# EAGLE board camera trigger control v1.0 (EAGLE 6.5.0)
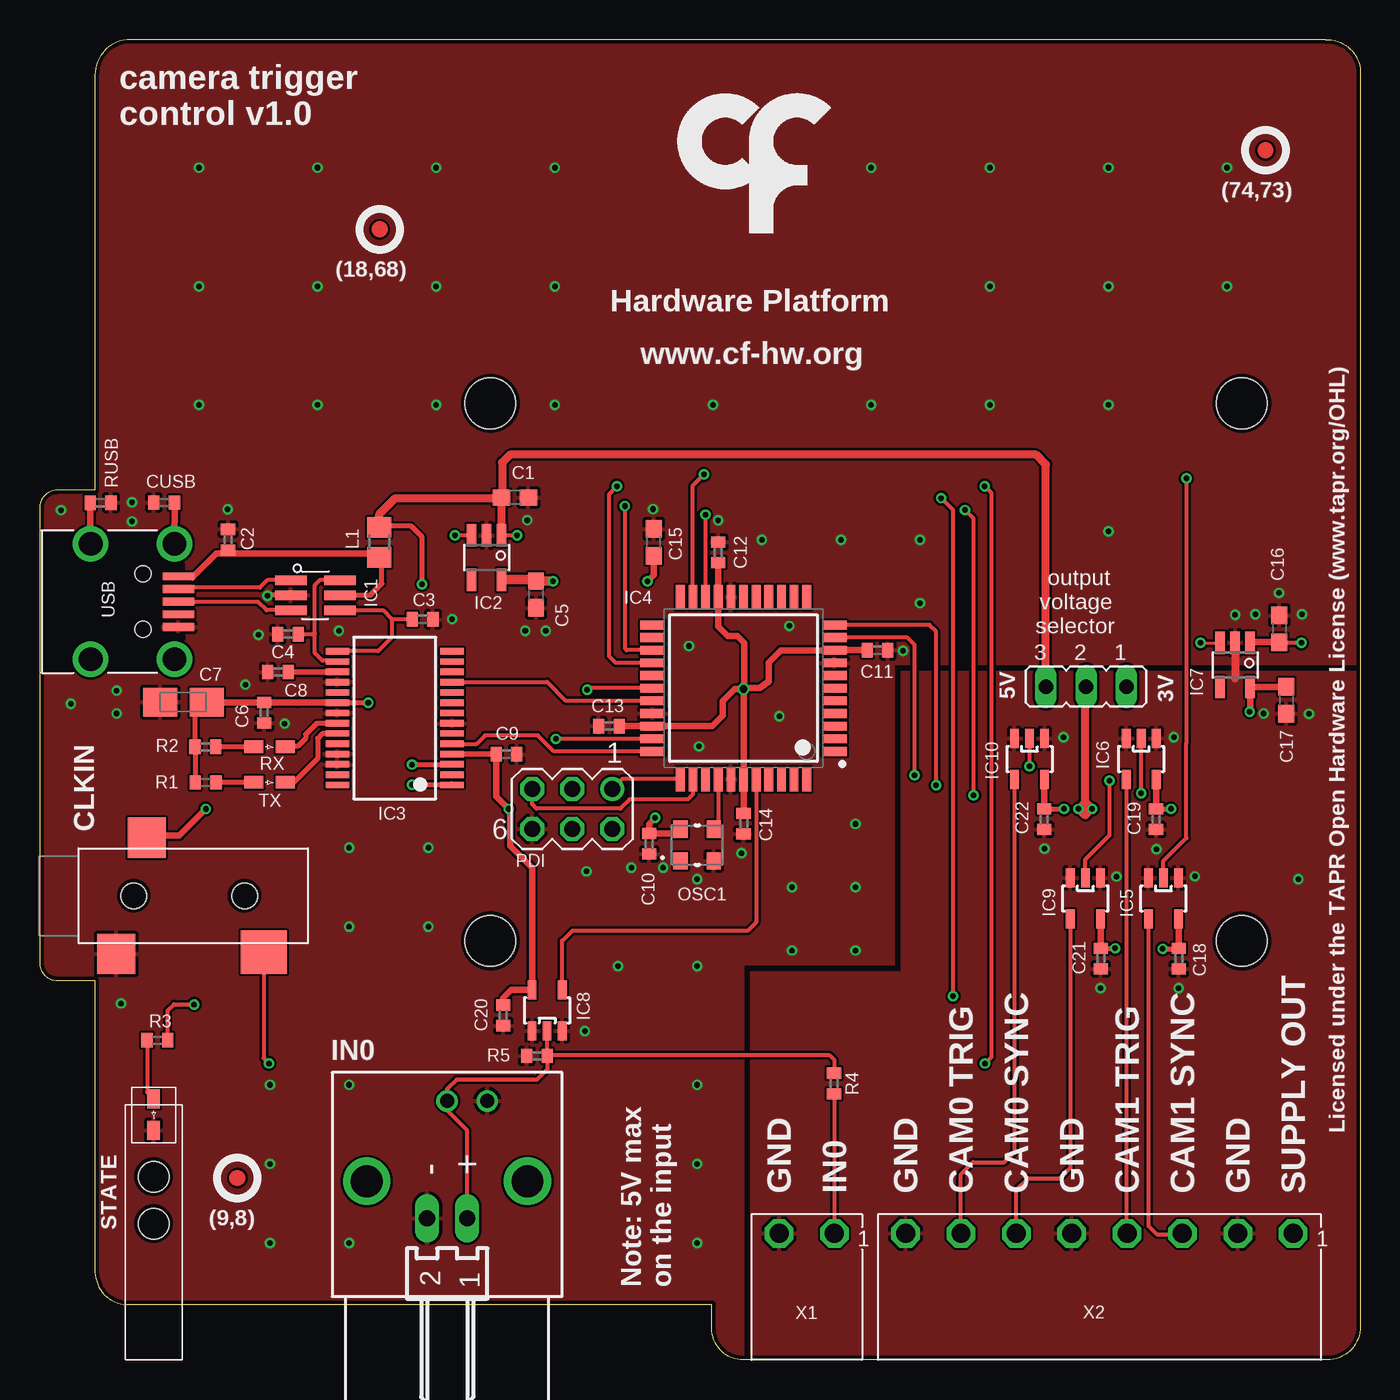
[diagram p0: board, top side]
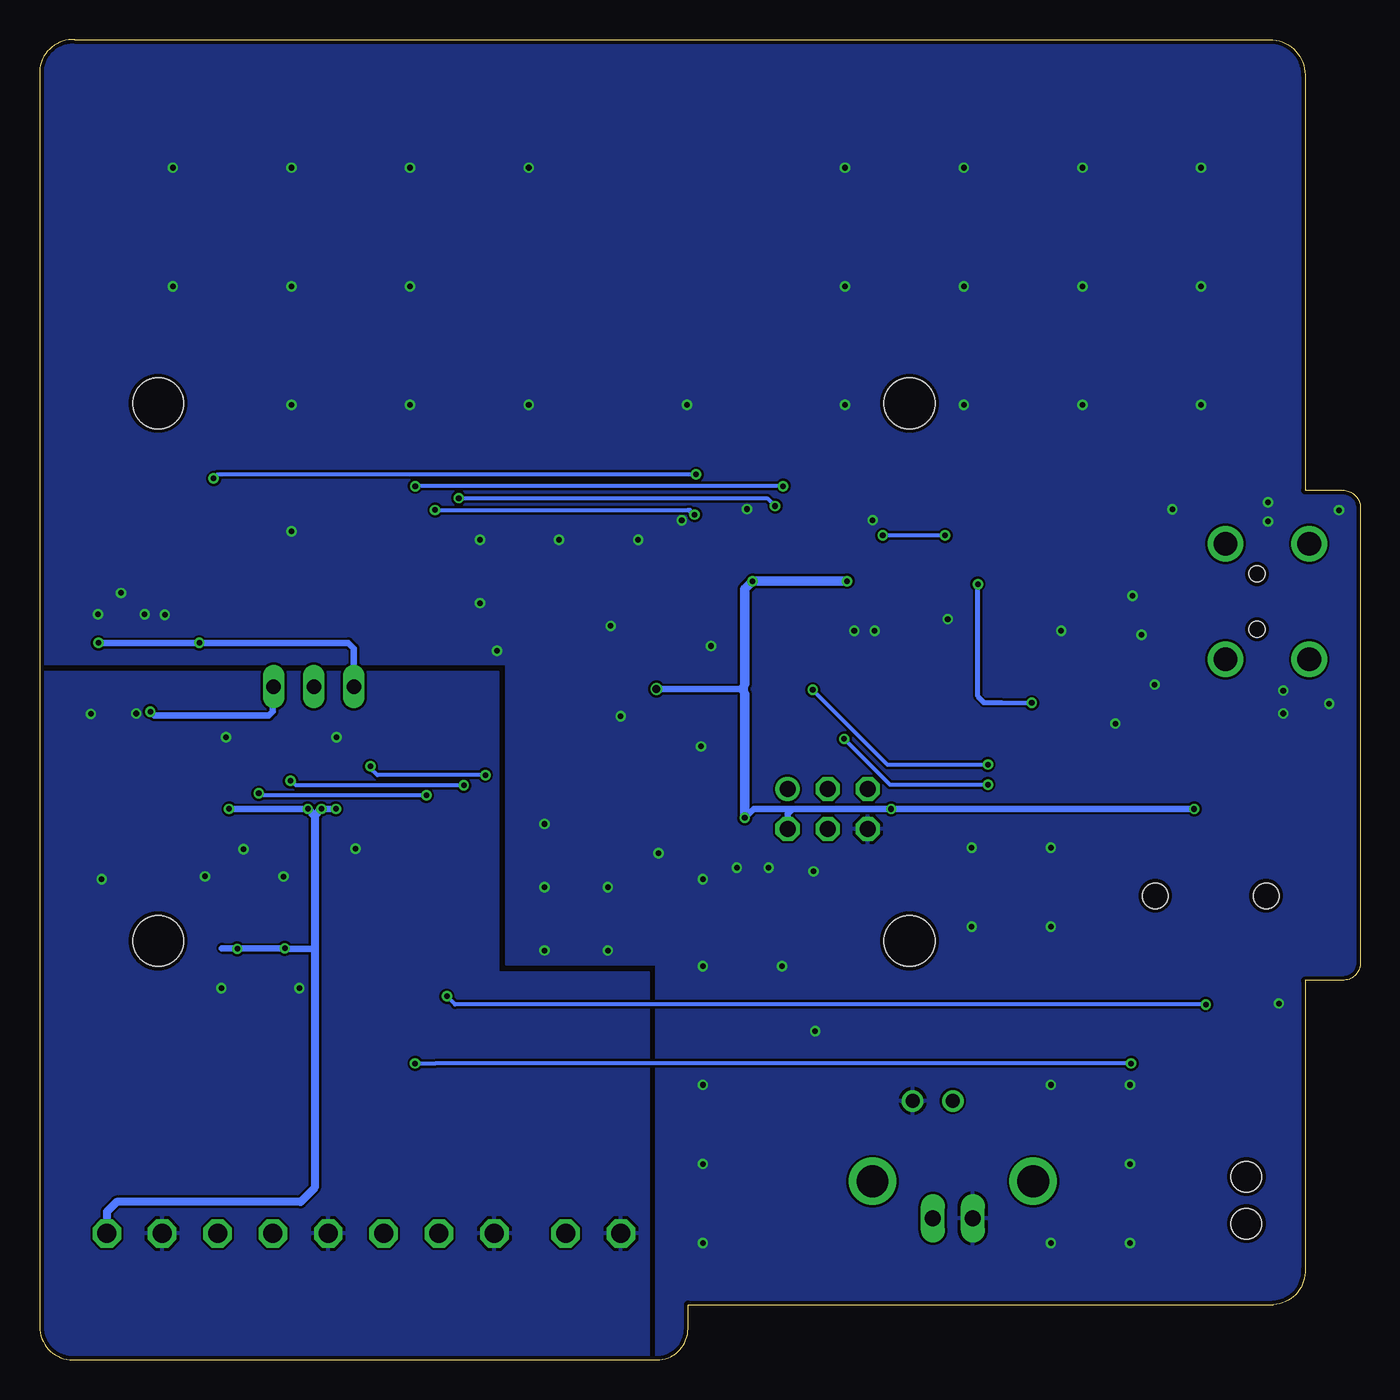
[diagram p1: board, bottom side, seen from below]

Size 83.5 x 83.5 mm. Coordinates in mm from the lower left corner, seen from the top.
Outline: 3.5,81.26 3.5,55 1.12,55 arc90 0,53.88 0,25.12 arc90 1.12,24 3.5,24 3.5,5.74 arc90 5.5,3.5 42.5,3.5 42.5,1.99 arc90 44.49,0 81.39,0 arc90 83.5,2.11 83.5,81.5 arc90 81.26,83.5 5.74,83.5 arc90 3.5,81.26
Copper layers (1*16): Top 0.018mm / dielectric 1.55mm / Bottom 0.018mm
Design rules "eC_2Layer_PClass6_BaseCopperO18_eCDefault *": minimum track width 0.15mm, minimum drill 0.35mm, track to track 0.15mm, track to pad 0.15mm, pad to pad 0.15mm, via to via 0.15mm, smd to smd 0mil, copper to edge 0.25mm, drill to drill 0.35mm, minimum pad ring 0.175mm, minimum via ring 0.125mm, stop-mask expansion 0mil, vias tented up to drill 0.45mm, thermal gap 0.2mm
Holes 3.2 mm at 28.5,60.5 28.5,26.5 76,60.5 76,26.5

## Footprints (pad centres in the part's own frame; a part is rotated, then mirrored left to right if it is on the bottom)
C0603 = smd 1.1 x 1: 1 -0.85,0; 2 0.85,0
C0402 = smd 0.7 x 0.9: 1 -0.65,0; 2 0.65,0
A/3216-18W = smd 2.15 x 1.8: + 1.475,0; - -1.475,0
35RASMT2BHNTRX = smd 2.4 x 2.55: 1 0.8,3.675; 5 -1.1,-3.675 | smd 2.9 x 2.75: 4 8.2,-3.575 | hole 1.6: 0,0; 7,0
SOT23-6L = smd 0.6 x 2: P$1 -0.95,-1.55; P$2 0,-1.55; P$3 0.95,-1.55; P$4 0.95,1.55; P$5 0,1.55; P$6 -0.95,1.55
TSOT23-5 = smd 0.6 x 1.408: 1 -0.95,-1.404; 2 0,-1.404; 3 0.95,-1.404; 4 0.95,1.404; 5 -0.95,1.404
SSOP28 = smd 0.4 x 1.5: 1 -4.225,-3.625; 2 -3.575,-3.625; 3 -2.925,-3.625; 4 -2.275,-3.625; 5 -1.625,-3.625; 6 -0.975,-3.625; 7 -0.325,-3.625; 8 0.325,-3.625; 9 0.975,-3.625; 10 1.625,-3.625; 11 2.275,-3.625; 12 2.925,-3.625; 13 3.575,-3.625; 14 4.225,-3.625; 15 4.225,3.625; 16 3.575,3.625; 17 2.925,3.625; 18 2.275,3.625; 19 1.625,3.625; 20 0.975,3.625; 21 0.325,3.625; 22 -0.325,3.625; 23 -0.975,3.625; 24 -1.625,3.625; 25 -2.275,3.625; 26 -2.925,3.625; 27 -3.575,3.625; 28 -4.225,3.625
QFP80P1200X1200X120-44N = smd 1.55 x 0.55: 1 -5.75,4; 2 -5.75,3.2; 3 -5.75,2.4; 4 -5.75,1.6; 5 -5.75,0.8; 6 -5.75,0; 7 -5.75,-0.8; 8 -5.75,-1.6; 9 -5.75,-2.4; 10 -5.75,-3.2; 11 -5.75,-4; 23 5.75,-4; 24 5.75,-3.2; 25 5.75,-2.4; 26 5.75,-1.6; 27 5.75,-0.8; 28 5.75,0; 29 5.75,0.8; 30 5.75,1.6; 31 5.75,2.4; 32 5.75,3.2; 33 5.75,4 | smd 0.55 x 1.55: 12 -4,-5.75; 13 -3.2,-5.75; 14 -2.4,-5.75; 15 -1.6,-5.75; 16 -0.8,-5.75; 17 0,-5.75; 18 0.8,-5.75; 19 1.6,-5.75; 20 2.4,-5.75; 21 3.2,-5.75; 22 4,-5.75; 34 4,5.75; 35 3.2,5.75; 36 2.4,5.75; 37 1.6,5.75; 38 0.8,5.75; 39 0,5.75; 40 -0.8,5.75; 41 -1.6,5.75; 42 -2.4,5.75; 43 -3.2,5.75; 44 -4,5.75
SOT23-5 = smd 0.55 x 1.2: 1 -0.95,-1.3; 2 0,-1.3; 3 0.95,-1.3; 4 0.95,1.3; 5 -0.95,1.3
BNC_RA = drill 0.9 pad 1.27: 1 0,-5.08; 2 -2.54,-5.08 | drill 2: P$1 -5.08,0; P$2 5.08,0
7395-02 = drill 1.016 long: 1 1.27,0; 2 -1.27,0
JP2 = drill 0.914 long: 1 -2.54,0; 2 0,0; 3 2.54,0
R0805 = smd 1.3 x 1.5: 1 -0.95,0; 2 0.95,0
OSCILLATOR_3.2X2.5 = smd 0.9 x 1.1: P$1 -1.05,-1; P$2 1.05,-1; P$3 1.05,1; P$4 -1.05,1
MA03-2 = drill 1.016: 1 -2.54,-1.27 | drill 1.016 octagon: 2 -2.54,1.27; 3 0,-1.27; 4 0,1.27; 5 2.54,-1.27; 6 2.54,1.27
R0402 = smd 0.7 x 0.9: 1 -0.65,0; 2 0.65,0
LED_HAND = smd 1.2 x 0.8: A -1,0; K 1,0
LED_PIPE_7513D2-L = hole 1.93: -1.486,0; 1.486,0
240-0002-1 = smd 0.5 x 2: P$1 -1.6,8.65; P$2 -0.8,8.65; P$3 0,8.65; P$4 0.8,8.65; P$5 1.6,8.65 | drill 1.5: SHIELD_1 -3.65,3.1; SHIELD_2 3.65,3.1; SHIELD_3 3.65,8.4; SHIELD_4 -3.65,8.4 | hole 1: -1.75,6.4; 1.75,6.4
CON_3.5MM_1X2 = drill 1.2 octagon: P1 -1.75,0; P2 1.75,0
CON_3.5MM_1X8 = drill 1.2 octagon: P1 -12.25,0; P2 -8.75,0; P3 -5.25,0; P4 -1.75,0; P5 1.75,0; P6 5.25,0; P7 8.75,0; P8 12.25,0

## Placement (x,y rotation side)
C1  10uF  [C0603]  30.05,54.54 0 top
C2  100nF  [C0402]  11.92,51.88 90 top
C3  47pF  [C0402]  24.22,46.84 0 top
C4  47pF  [C0402]  15.71,45.9 180 top
C5  10uF  [C0603]  31.39,48.41 270 top
C6  100nF  [C0402]  14.21,40.93 270 top
C7  4.7uF  [A/3216-18W]  9.09,41.61 0 top
C8  100nF  [C0402]  15.08,43.51 180 top
C9  100nF  [C0402]  29.53,38.3 0 top
C10  100nF  [C0402]  38.54,32.64 270 top
C11  100nF  [C0402]  52.97,44.88 0 top
C12  100nF  [C0402]  42.9,51.07 90 top
C13  100nF  [C0402]  36.01,40.08 180 top
C14  330nF  [C0402]  44.51,33.91 270 top
C15  10uF  [C0603]  38.82,51.7 90 top
C16  10uF  [C0603]  78.38,46.24 90 top
C17  10uF  [C0603]  78.81,41.72 270 top
C18  100nF  [C0402]  72.01,25.37 270 top
C19  100nF  [C0402]  70.58,34.19 270 top
C20  100nF  [C0402]  29.32,21.79 270 top
C21  100nF  [C0402]  67.08,25.37 270 top
C22  100nF  [C0402]  63.52,34.19 270 top
CLKIN  [35RASMT2BHNTRX]  5.96,29.36 0 top
CUSB  4.7nF  [C0402]  7.88,54.22 180 top
IC1  USBLC6-2SC6  [SOT23-6L]  17.44,48.36 270 top
IC2  LP5907MFX-3.3  [TSOT23-5]  28.27,50.74 180 top
IC3  FT232RL  [SSOP28]  22.45,40.59 90 top
IC4  ATXMEGA32A4U-AU  [QFP80P1200X1200X120-44N]  44.5,42.48 180 top
IC5  M74VHC1GT50DTT1G  [SOT23-5]  71.05,29.18 180 top
IC6  M74VHC1GT50DTT1G  [SOT23-5]  69.64,38 180 top
IC7  LP5907MFX-3.3  [TSOT23-5]  75.58,43.95 180 top
IC8  SN74LVC1G125  [SOT23-5]  32.09,22.11 0 top
IC9  M74VHC1GT50DTT1G  [SOT23-5]  66.11,29.18 180 top
IC10  M74VHC1GT50DTT1G  [SOT23-5]  62.58,38 180 top
IN  BNC  [BNC_RA]  25.77,11.3 180 top
IN1  [7395-02]  25.77,8.96 0 top
JP1  [JP2]  66.16,42.58 180 top
L1  ???  [R0805]  21.48,51.72 270 top
OSC1  [OSCILLATOR_3.2X2.5]  41.57,32.56 0 top
PDI  [MA03-2]  33.68,34.84 180 top
R1  2050 NA  [R0402]  10.5,36.53 180 top
R2  680 NA  [R0402]  10.48,38.77 180 top
R3  68  [R0402]  7.44,20.22 0 top
R4  330  [R0402]  50.22,17.49 90 top
R5  100k  [R0402]  31.45,19.23 180 top
RUSB  1M  [R0402]  3.87,54.2 0 top
RX  GREEN NA  [LED_HAND]  14.53,38.77 0 top
STATE  GREEN  [LED_HAND]  7.21,15.51 270 top
TX  RED NA  [LED_HAND]  14.53,36.53 0 top
U$1  [LED_PIPE_7513D2-L]  7.21,10.11 90 top
U$4  [FIDUCIAL]  12.5,11.5 0 top
U$5  [FIDUCIAL]  21.5,71.5 0 top
U$6  [FIDUCIAL]  77.5,76.5 0 top
U$9  [LOGO_6]  43.5,77 0 top
USB  [240-0002-1]  0.13,47.96 270 top
X1  CON_3.5MM_1X2  [CON_3.5MM_1X2]  48.5,8 180 top
X2  CON_3.5MM_1X8  [CON_3.5MM_1X8]  67,8 180 top

## Library data of the parts
C1-C22 CUSB L1 R1-R5 RUSB = rcl
CLKIN IN USB X1 X2 = CNP-connectors
IC1 = CNP 2
IC2 IC7 = CNP
IC3 = ftdichip; MPN: FT232RL; OC_FARNELL: 1146032; OC_NEWARK: 91K9918
IC4 = xmega-a4
IC5 IC6 IC8-IC10 = My_library 0v2
IN1 = con-molex; OC_FARNELL: 9731601; OC_NEWARK: unknown
JP1 = jumper
OSC1 RX STATE TX U$1 U$9 = CNP-miscellaneous
PDI = con-lstb; OC_FARNELL: unknown; OC_NEWARK: unknown
U$4-U$6 = fiducial

## Nets
+5V: C1.1 C6.1 C7.+ C16.1 IC2.1 IC2.3 IC3.20 IC7.1 IC7.3 JP1.3 L1.1 R1.2 R2.2
CAM0_S: IC4.11 IC9.2
CAM0_SYNC: IC9.4 X2.P6
CAM0_T: IC4.10 IC10.2
CAM0_TRIG: IC10.4 X2.P7
CAM1_S: IC4.21 IC5.2
CAM1_SYNC: IC5.4 X2.P3
CAM1_T: IC4.20 IC6.2
CAM1_TRIG: IC6.4 X2.P4
CLK_IN: CLKIN.4 IC4.26
FT_CTS: IC3.11 IC4.29
FT_RTS: IC3.3 IC4.28
FT_RXD: IC3.5 IC4.33
FT_TXD: IC3.1 IC4.32
GND: C1.2 C2.2 C3.2 C4.2 C5.2 C6.2 C7.- C8.2 C9.2 C10.2 C11.2 C12.2 C13.2 C14.2 C15.2 C16.2 C17.2 C18.2 C19.2 C20.2 C21.2 C22.2 CLKIN.5 CUSB.2 IC1.P$2 IC2.2 IC3.7 IC3.18 IC3.21 IC3.25 IC3.26 IC4.8 IC4.18 IC4.30 IC4.38 IC5.1 IC5.3 IC6.1 IC6.3 IC7.2 IC8.1 IC8.3 IC9.1 IC9.3 IC10.1 IC10.3 IN1.2 IN.2 OSC1.P$2 PDI.6 R5.2 RUSB.2 STATE.K USB.P$5 X1.P2 X2.P2 X2.P5 X2.P8
IN0: IC8.2 IN1.1 IN.1 R4.2 R5.1
IN0_CONNECTOR: R4.1 X1.P1
INPUT0: IC4.40 IC8.4
N$23: R3.1 STATE.A
N$38: C8.1 IC3.17
N$39: C2.1 IC1.P$5 L1.2 USB.P$1
N$40: IC1.P$1 USB.P$2
N$47: R2.1 RX.A
N$48: IC3.23 TX.K
N$49: IC3.22 RX.K
N$50: IC1.P$3 USB.P$3
N$59: CUSB.1 USB.SHIELD_4
N$61: RUSB.1 USB.SHIELD_1
N$62: R1.1 TX.A
OSC1: IC4.37 OSC1.P$3
PDI-CLK: IC4.35 PDI.5
PDI-DATA: IC4.34 PDI.1
STATE: IC4.25 R3.2
USBDM: C4.1 IC1.P$6 IC3.16
USBDP: C3.1 IC1.P$4 IC3.15
VCC: C18.1 C19.1 C21.1 C22.1 IC5.5 IC6.5 IC9.5 IC10.5 JP1.2 X2.P1
VCCIO: C5.1 C9.1 C10.1 C11.1 C12.1 C13.1 C14.1 C15.1 C20.1 CLKIN.1 IC2.5 IC3.4 IC4.9 IC4.19 IC4.31 IC4.39 IC8.5 OSC1.P$4 PDI.2
VDIG[3V]: C17.1 IC7.5 JP1.1

## Tracks (layer width: path | path; a pad name or v marks a point on that pad's centre or on a via)
+5V  (via drill 0.35 pad 0.65)
  Top 0.203: IC7.1 77.86,45.36 | v73.4,45.35 IC7.3
  Top 0.254: IC2.3 v26.27,52.15 v26.26,52.14 | v30.2,52.14 29.22,52.14 IC2.1 | v79.77,45.35 78.42,45.35 C16.1
  Top 0.305: IC2.1 | 16.31,41.56 C6.1 | v20.78,41.55 IC3.20 | R1.2 9.83,36.55 R2.2 9.84,38.79 9.84,41.45 9.7,41.59 10.56,41.59 C7.+ | v24.18,49.06 24.18,52.05 23.51,52.72 21.54,52.72 L1.1 | 76.56,45.39 IC7.1
  Top 0.406: IC3.20 16.31,41.56 10.61,41.56 C7.+ | C16.1 76.56,45.39
  Top 0.508: IC2.1 | IC2.1 29.22,54.52 C1.1 | L1.1 21.49,53.49 22.5,54.5 29.16,54.5 C1.1 | JP1.3 63.62,56.63 63,57.25 29.75,57.25 29.25,56.75 29.25,54.59 C1.1
  Bottom 0.254: v26.26,52.14 v30.2,52.14
  Bottom 0.305: v24.18,49.06 24.18,41.96 23.81,41.57 22.7,41.57 v20.78,41.55
  Bottom 0.406: v79.77,45.35 v73.4,45.35 63.97,45.35 63.62,45 JP1.3
CAM0_S  (via drill 0.35 pad 0.65)
  Top 0.254: v67.64,36.62 67.64,33.17 66.11,31.65 IC9.2 | v56.68,36.34 56.68,46.06 56.26,46.49 IC4.11
  Bottom 0.254: v56.68,36.34 67.28,36.34 v67.64,36.62
CAM0_SYNC
  Top 0.254: IC9.4 65.16,12.16 64.5,11.5 62.5,11.5 61.75,10.75 X2.P6
CAM0_T  (via drill 0.35 pad 0.65)
  Top 0.254: v62.58,37.54 IC10.2 | v55.31,36.98 55.31,45.22 54.86,45.68 IC4.10
  Bottom 0.254: v55.31,36.98 62.15,36.98 62.58,37.41 v62.58,37.54
CAM0_TRIG
  Top 0.254: IC10.4 61.63,13.13 61.25,12.75 61,12.5 59,12.5 58.25,11.75 X2.P7
CAM1_S  (via drill 0.35 pad 0.65)
  Top 0.254: IC4.21 41.3,55.3 v42,56 | v72.5,55.75 72.5,39.5 72.5,39 72.5,33 71.05,31.55 IC5.2
  Bottom 0.254: v42,56 72.25,56 v72.5,55.75
CAM1_SYNC
  Top 0.254: IC5.4 70.1,8.47 70.61,7.96 72.21,7.96 X2.P3
CAM1_T  (via drill 0.35 pad 0.65)
  Top 0.254: v69.64,35.84 IC6.2 | v59.05,35.71 59.05,53.2 v58.5,53.75 | IC4.20 42.1,53.45 v42.09,53.46
  Bottom 0.254: v59.05,35.71 69.52,35.71 v69.64,35.84 | v58.5,53.75 42.5,53.75 | 42.5,53.75 42.38,53.75 v42.09,53.46 42.21,53.46 42.5,53.75
CAM1_TRIG
  Top 0.254: IC6.4 68.69,8.06 X2.P4
CLK_IN  (via drill 0.35 pad 0.65)
  Top 0.254: IC4.26 36.42,44.08 36,44.5 36,54.75 v36.5,55.25 | CLKIN.4 14.16,19.09 v14.5,18.75 | v59.75,55.25 60.19,54.81 60.19,19.18 v59.76,18.75
  Bottom 0.254: v36.5,55.25 v59.75,55.25 | v14.5,18.75 58.5,18.75 v59.76,18.75
FT_CTS
  Top 0.254: 26.09,42.88 32.08,42.88 33.27,41.68 IC4.29
  Top 0.305: 26.09,42.88 IC3.11
FT_RTS  (via drill 0.35 pad 0.65)
  Top 0.254: IC4.28 34.72,42.48 v34.62,42.38
  Top 0.305: v23.55,37.66 IC3.3
  Bottom 0.254: v34.62,42.38 29.9,37.66 v23.55,37.66
FT_RXD
  Top 0.254: IC3.5 27.63,38.96 28.17,39.5 31.5,39.5 32.52,38.48 IC4.33
  Top 0.305: 26.12,38.93 IC3.5
  Top 0.406: 26.09,38.96 IC3.5
FT_TXD  (via drill 0.35 pad 0.65)
  Top 0.254: IC4.32 v32.64,39.28
  Top 0.305: v23.55,36.39 26.06,36.39
  Top 0.406: 26.06,36.39 IC3.1
  Bottom 0.254: v32.64,39.28 29.75,36.39 v23.55,36.39
GND  (via drill 0.35 pad 0.65)
  Top 0.305: IC1.P$2 14.44,48.36 v14.4,48.32
  Top 0.406: IC4.8
  Top 0.508: 75.58,45.02 75.58,43.12
  other vias: 18.92,46.12 5.85,54.24 5.85,53.02 11.89,53.78 26.09,46.85 13.84,45.86 13.01,42.71 15.5,40.25 4.88,42.33 4.88,40.88 30.7,46.12 32,46.12 46.76,40.7 41.05,45.15 47.4,46.42 41.68,38.8 54.58,44.85 45.66,51.86 42.9,53.1 44.38,32.04 5.16,22.54 39.42,31.13 30.83,53.11 41.57,30.4 37.41,31.13 38.78,53.81 14.57,12.4 14.57,17.4 19.57,27.4 19.57,32.4 24.57,32.4 1.35,53.74 1.97,41.5 19.57,7.4 14.57,7.4 78.35,48.5 76.85,47.15 79.8,47.15 80.26,40.86 77.39,40.88 63.52,32.33 70.61,32.31 72.01,23.52 34.47,20.79 68.09,30.57 73.03,30.58 64.72,39.39 75.58,47.13 67.08,23.52 71.71,39.39 25.07,60.4 17.57,60.4 10.07,60.4 10.07,67.9 10.07,75.4 17.57,75.4 17.57,67.9 25.07,67.9 32.57,67.9 32.57,60.4 32.57,75.4 25.07,75.4 52.57,75.4 60.07,75.4 67.57,75.4 75.07,75.4 75.07,67.9 67.57,67.9 67.57,60.4 60.07,60.4 60.07,67.9 52.57,60.4 42.57,60.4 51.57,33.9 51.57,29.9 51.57,25.9 47.57,25.9 47.57,29.9 41.57,24.9 36.57,24.9 34.57,30.9 24.57,27.4 19.57,17.4 50.66,51.86 55.66,51.86 55.66,47.86 67.57,52.4 79.57,30.4 41.57,12.4 41.57,17.4 41.57,7.4
  pour Bottom: 44.5,-0.06 44.5,25 54,25 54,44 83.5,44 83.5,83.5 3.5,83.5 3.5,55 0,55 0,24 3.5,24 3.5,3.5 42.11,3.5 42.11,-0.06
  pour Top: 44.5,3.5 44.5,25 54,25 54,44 83.5,44 83.5,83.5 3.5,83.5 3.5,55 0,55 0,24 3.5,24 3.5,3.5 41.6,3.5 42.11,3.5 42.11,-0.06 43.63,-0.06 44.5,-0.06
  pour Top: 83.5,0 83.5,43.5 54.5,43.5 54.5,24.5 45,24.5 45,0
  pour Bottom: 83.5,0 83.5,43.5 54.5,43.5 54.5,24.5 45,24.5 45,0
IN0
  Top 0.254: IN1.1 27.04,14.51 25.77,15.78 IN.1 | 25.75,16.29 IN.1 | IC8.2 32.1,20.79 R5.1 32.08,19.25 | IN.1 25.77,16.87 | 32.08,19.25 49.97,19.25 50.23,18.99 R4.2 | 32.08,19.25 32.08,18.37 31.44,17.72 26.36,17.72 25.77,17.13 IN.1
IN0_CONNECTOR
  Top 0.254: X1.P1 50.25,16.81 R4.1
INPUT0
  Top 0.254: IC8.4 33.04,26.5 33.68,27.14 44.76,27.14 45.3,27.68 IC4.40
N$23
  Top 0.254: R3.1 6.79,16.93 STATE.A
N$38
  Top 0.305: 16.04,43.51 C8.1
  Top 0.356: IC3.17 16.04,43.51
N$39
  Top 0.305: IC1.P$5 20.92,48.36 21.64,49.09 21.64,50.36 21.01,50.99 21.49,50.99 L1.2 | 9.66,49.49 8.83,49.51 USB.P$1 | C2.1 11.92,51.12
  Top 0.406: 21.01,50.99 11.79,50.99 | 11.79,50.99 11.16,50.99 9.66,49.49 | 11.92,51.12 11.79,50.99
N$40
  Top 0.254: IC1.P$1 14.39,49.31 13.92,48.84 8.87,48.84
  Top 0.305: 8.81,48.78 USB.P$2 8.87,48.84
N$47
  Top 0.305: RX.A R2.1
N$48
  Top 0.305: IC3.23 17.89,39.61 17.58,39.31 17.58,38.04 16.05,36.51 15.54,36.51 TX.K
N$49
  Top 0.305: IC3.22 17.52,40.26 16.82,39.56 16.82,39.31 16.31,38.8 15.55,38.8 RX.K
N$50
  Top 0.254: IC1.P$3 14.35,47.41 13.82,47.94 8.8,47.94
  Top 0.305: 8.81,47.93 USB.P$3 8.8,47.94
N$59
  Top 0.305: 8.51,51.63 USB.SHIELD_4
  Top 0.406: CUSB.1 8.51,51.63
N$61
  Top 0.305: 3.22,51.62 USB.SHIELD_1
  Top 0.406: RUSB.1 3.22,51.62
N$62
  Top 0.305: TX.A R1.1
OSC1
  Top 0.152: 42.9,33.84 OSC1.P$3
  Top 0.254: IC4.37 42.9,33.84
PDI-CLK
  Top 0.254: IC4.35 41.3,35.77 40.99,35.45 37.31,35.45 36.72,34.87 31.41,34.87 31.14,35.15 PDI.5
PDI-DATA
  Top 0.254: IC4.34 36.83,36.73 PDI.1
STATE  (via drill 0.35 pad 0.65)
  Top 0.254: IC4.25 37.12,44.88 37,45 v37,54 | v57.75,23 57.75,53.75 v57,54.5 | R3.2 8.09,22.09 8.5,22.5 9.75,22.5 v9.78,22.47
  Bottom 0.254: v9.78,22.47 57.22,22.47 v57.75,23 | v57,54.5 37.5,54.5 v37,54
USBDM
  Top 0.254: IC1.P$6 17.71,49.31 17.4,49 17.4,45.91 | 18.77,44.22 17.88,44.22 17.4,44.7 17.4,45.91 | C4.1 17.39,45.9 17.4,45.91
  Top 0.305: 18.77,44.22 IC3.16
USBDP
  Top 0.254: IC1.P$4 21.72,47.41 22.28,46.85 | 22.28,46.83 22.28,45.7 21.4,44.82 IC3.15 | C3.1 22.29,46.84
  Top 0.305: IC3.15 | 22.28,46.85 22.28,46.83 22.29,46.84
VCC  (via drill 0.35 pad 0.65)
  Top 0.254: 71.99,26 C18.1
  Top 0.305: C21.1 67.06,26.04 67.84,26.04 v68,26.03 | 72,26.04 C18.1 | C19.1 70.59,34.85 v71.52,34.85 | C22.1 64.92,34.85 v64.77,34.85 | 72.01,27.87 IC5.5 | v71.52,34.85 | 70.58,36.69 IC6.5 | 63.52,36.69 IC10.5 | v71,26 71.99,26
  Top 0.406: C18.1 72.01,27.87 | 66.52,34.87 v65.68,34.85 | C19.1 70.58,36.69 | C22.1 63.52,36.69 | C21.1 67.08,27.87 IC9.5
  Top 0.508: 66.11,35.28 66.11,42.53 JP1.2 | 66.11,35.28 v65.68,34.85 66.11,34.44 66.52,34.87 | 66.11,35.28 66.52,34.87 | 66.52,34.87 v66.54,34.85
  Bottom 0.254: 71.98,26.03 71.03,26.03 v71,26
  Bottom 0.406: 71.98,26.03 v68,26.03 | v71.52,34.85 v66.54,34.85 66.52,34.85 | v65.68,34.85 v64.77,34.85 | 67.97,26 66.11,26
  Bottom 0.508: 66.11,34.41 v65.68,34.85 | 66.11,34.41 66.52,34.85 | 67.97,26 v68,26.03 | 66.11,34.41 66.11,26 66.11,10.89 67,10 78.63,10 79.25,9.38 X2.P1 | X2.P1
VCCIO  (via drill 0.35 pad 0.65, 0.5 pad 0.65)
  Top 0.305: 31.31,49.34 C5.1 | C14.1
  Top 0.356: IC3.4 28.87,38.31
  Top 0.406: C11.1 IC4.9 | IC4.9 | C12.1 42.9,49.55 IC4.19 42.9,46.38 43.49,45.79 44.1,45.79 44.56,45.33 44.56,42.59 44.41,42.43 | C13.1 IC4.31 42.51,40.08 43.19,40.76 43.19,41.67 43.95,42.43 44.41,42.43 | 28.87,38.31 C9.1 28.88,35.63 v29.66,34.84 29.75,34.76 29.75,32.5 31.14,31.11 IC8.5 29.82,23.4 29.32,22.9 C20.1 | 44.41,42.43 44.5,42.49 | 44.5,42.49 v44.5,42.43 IC4.39 C14.1 | IC4.9 46.85,44.87 46.08,44.11 46.08,42.89 45.53,42.49 44.5,42.49 | OSC1.P$4 40.52,33.29 C10.1 38.54,33.9 v38.92,34.28 | CLKIN.1 6.76,33.17 8.83,33.17 v10.51,34.84 | C15.1 38.82,49.64 v38.42,49.24
  Top 0.61: IC2.5 31.31,49.34 | C5.1 32.44,49.26 v32.46,49.24
  Bottom 0.406: v44.5,42.43 39.23,42.43 | 39.23,42.43 38.92,42.13 38.92,42.74 39.23,42.43 | 35.88,34.84 v29.66,34.84 v10.51,34.84 | 35.88,34.84 38.36,34.84 v38.92,34.28 | PDI.2 36.22,34.51 35.88,34.84
  Bottom 0.61: 38.92,42.13 v38.92,34.28 | v32.46,49.24 v38.42,49.24 38.92,48.75 38.92,42.74
VDIG[3V]  (via drill 0.35 pad 0.65)
  Top 0.406: C17.1 78.79,42.55 IC7.5 76.53,41.03 v76.5,41
  Bottom 0.406: v76.5,41 76.25,40.75 69,40.75 68.75,41 68.75,42.53 JP1.1

## Text on the board
tPlace: Licensed under the TAPR Open / Hardware License (www.tapr.org/OHL) / / Copyright 2017 Artur Silva and Filipe Carvalho | camera trigger / control v1.0 | (74,73) | (18,68) | Hardware Platform | www.cf-hw.org | output | voltage | selector | 5V | 3V | IN0 | Licensed under the TAPR Open Hardware License (www.tapr.org/OHL) | - | + | GND | IN0 | GND | CAM0 TRIG | CAM0 SYNC | GND | CAM1 TRIG | CAM1 SYNC | GND | SUPPLY OUT | (9,8) | Note: 5V max / on the input